# Altium PCB PocketBeagle.PcbDoc (part 1 of 2)
Units mm, origin at the board's own origin, x right, y up, seen from the top; angles counter-clockwise.
Board outline 55 x 35 mm, 4 copper layers (Top, VDD, DigitalGND, Bottom), stack 2.11 mm thick; 63 components, 132 nets, 486 pads, 168 vias.
Unrouted connection lines stored in the file: 3.
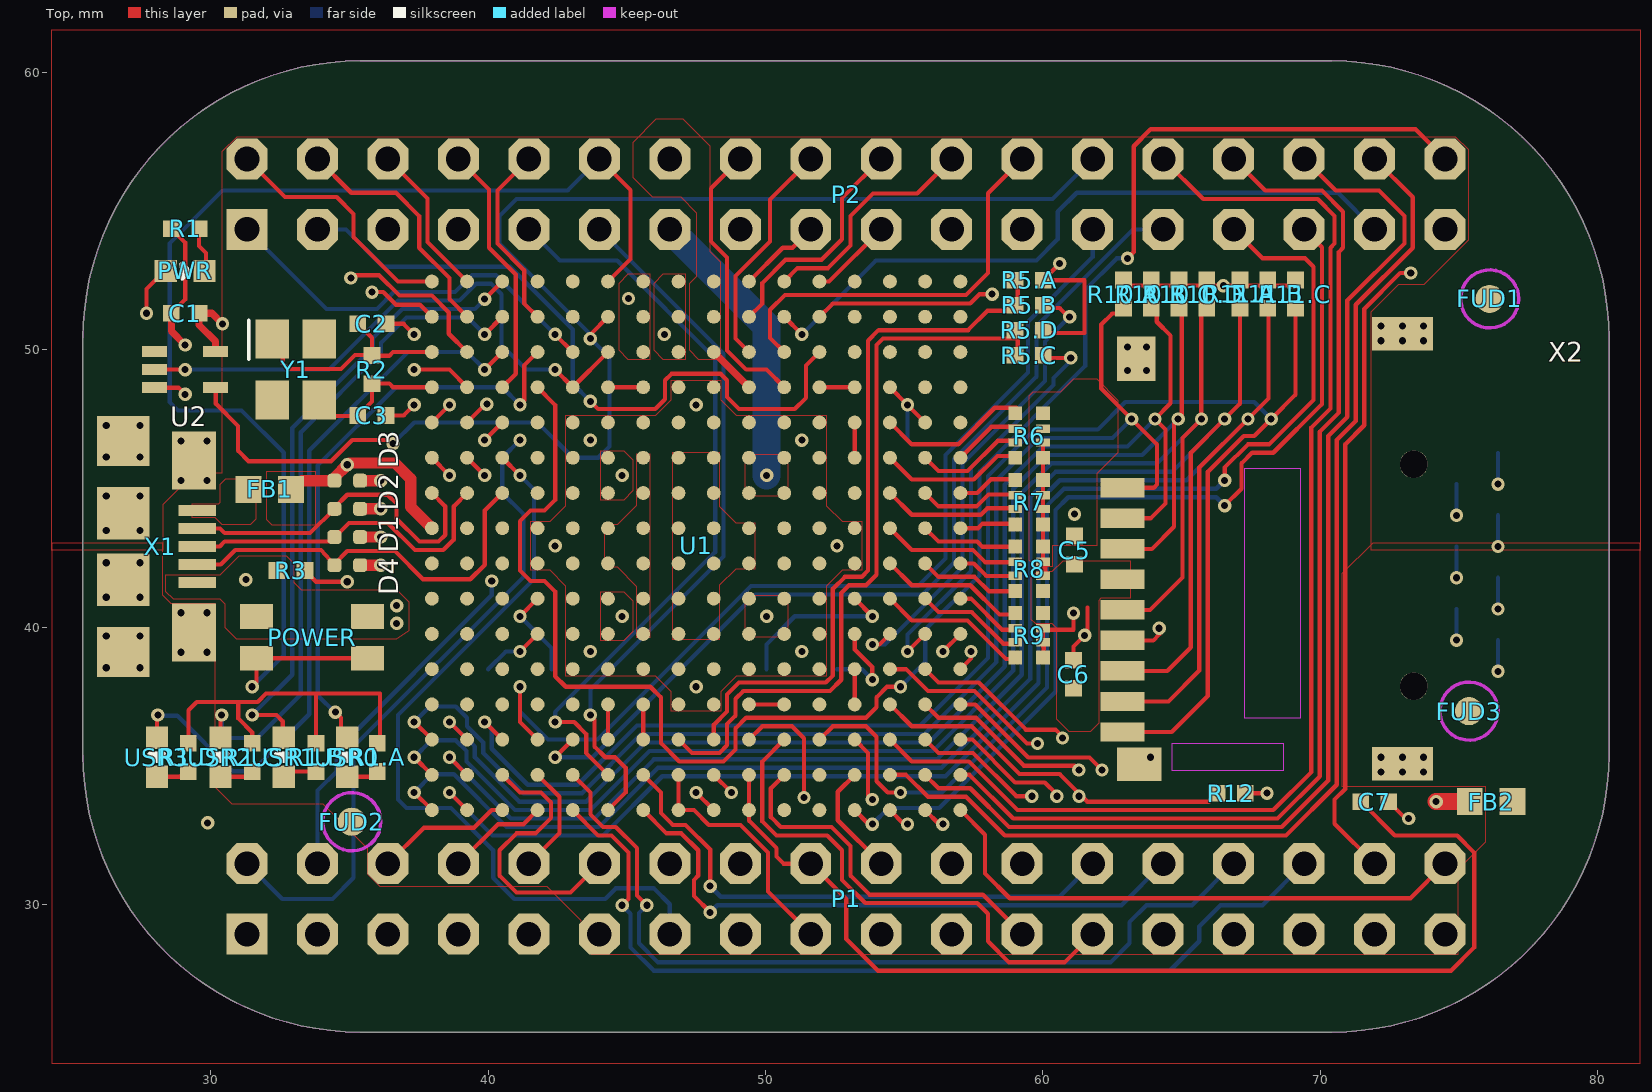
[diagram p0: Top view]
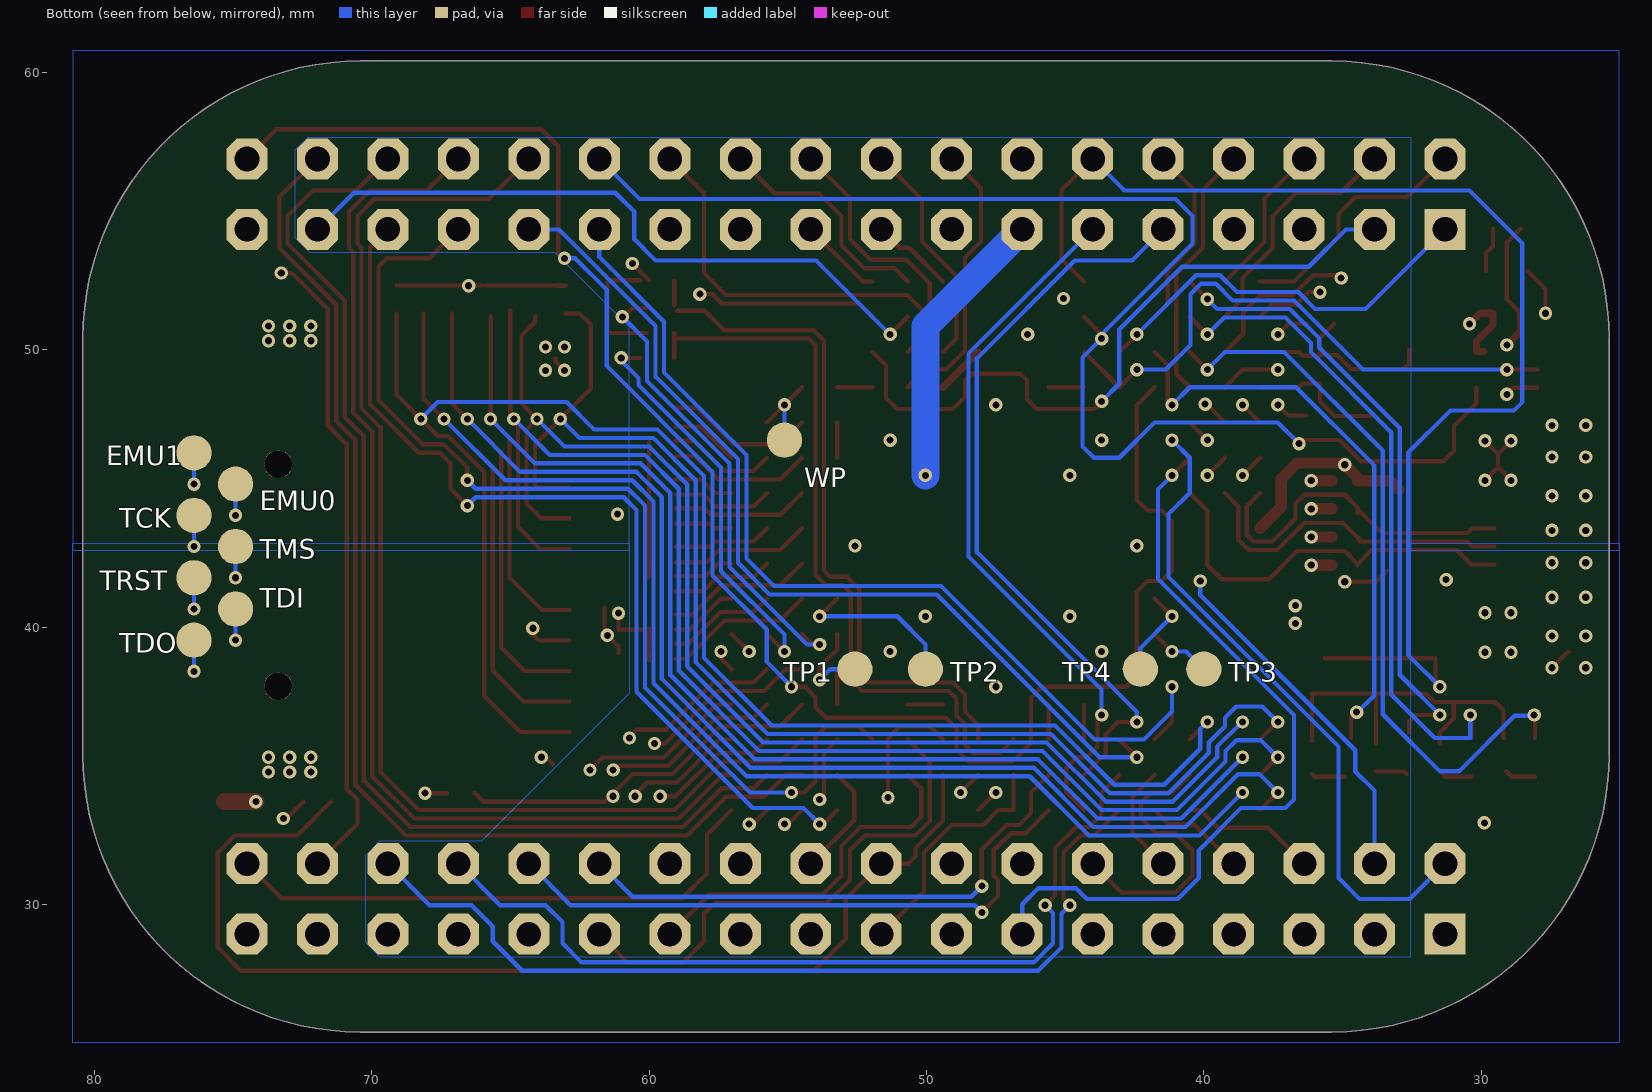
[diagram p1: Bottom view, seen from below]
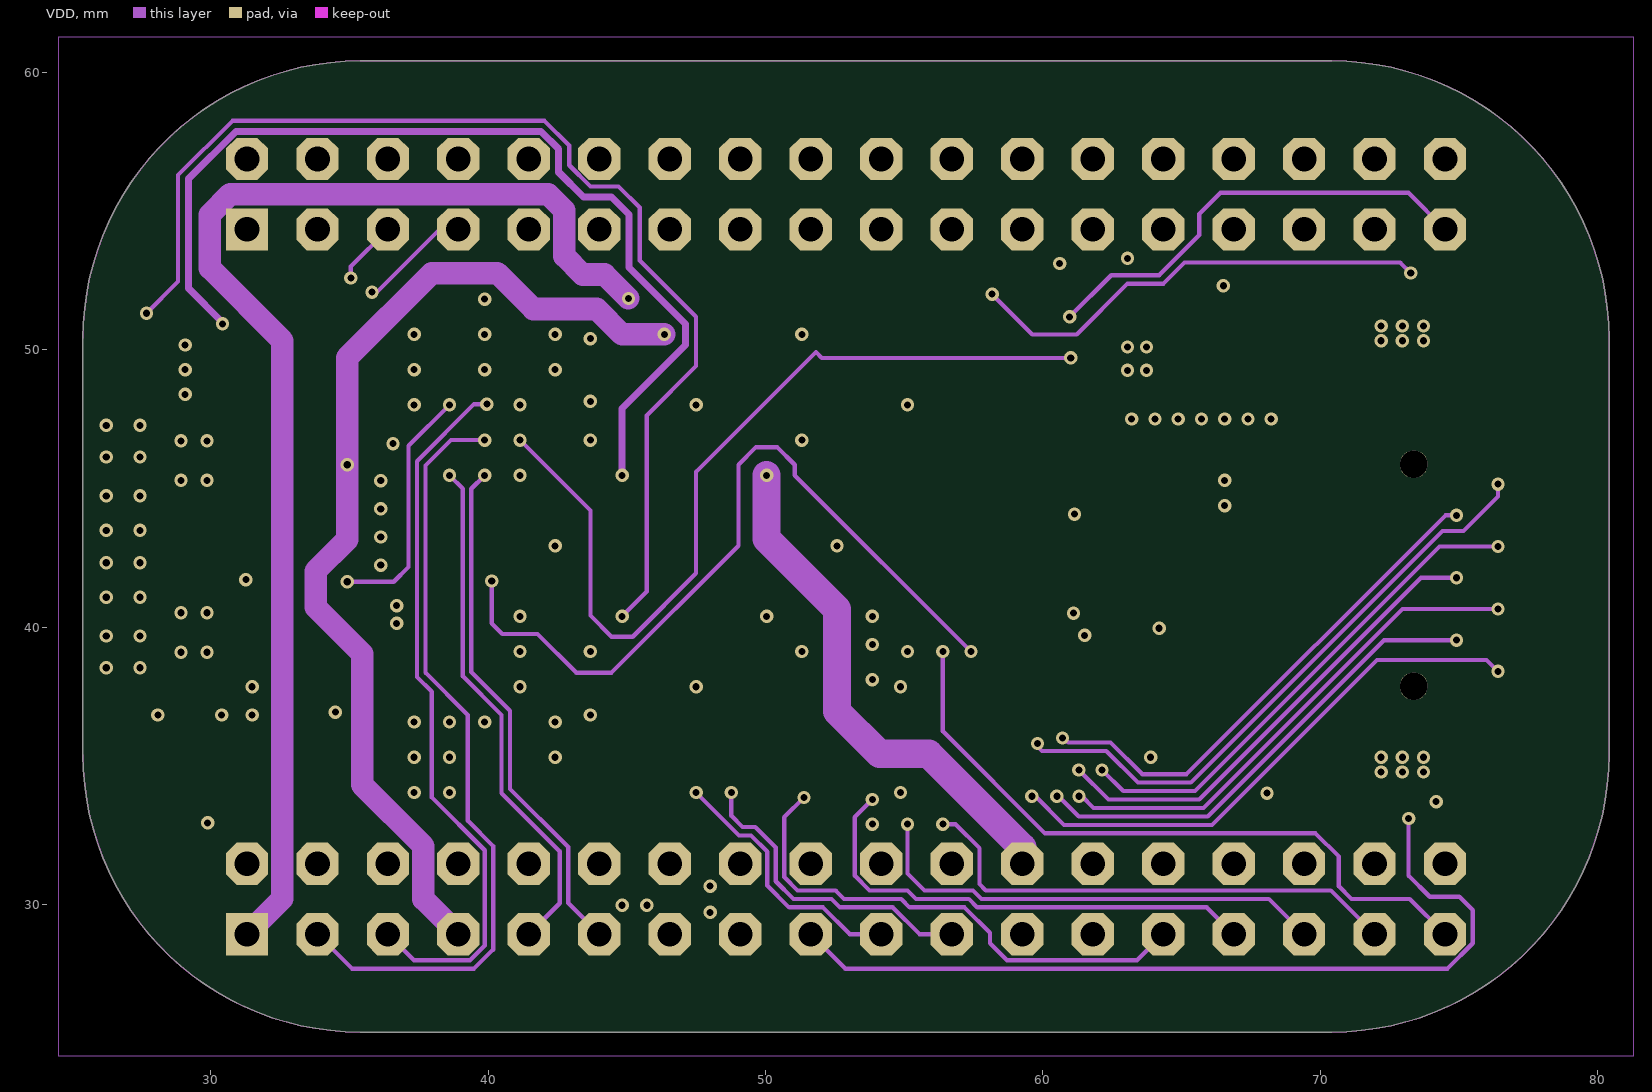
[diagram p2: VDD]
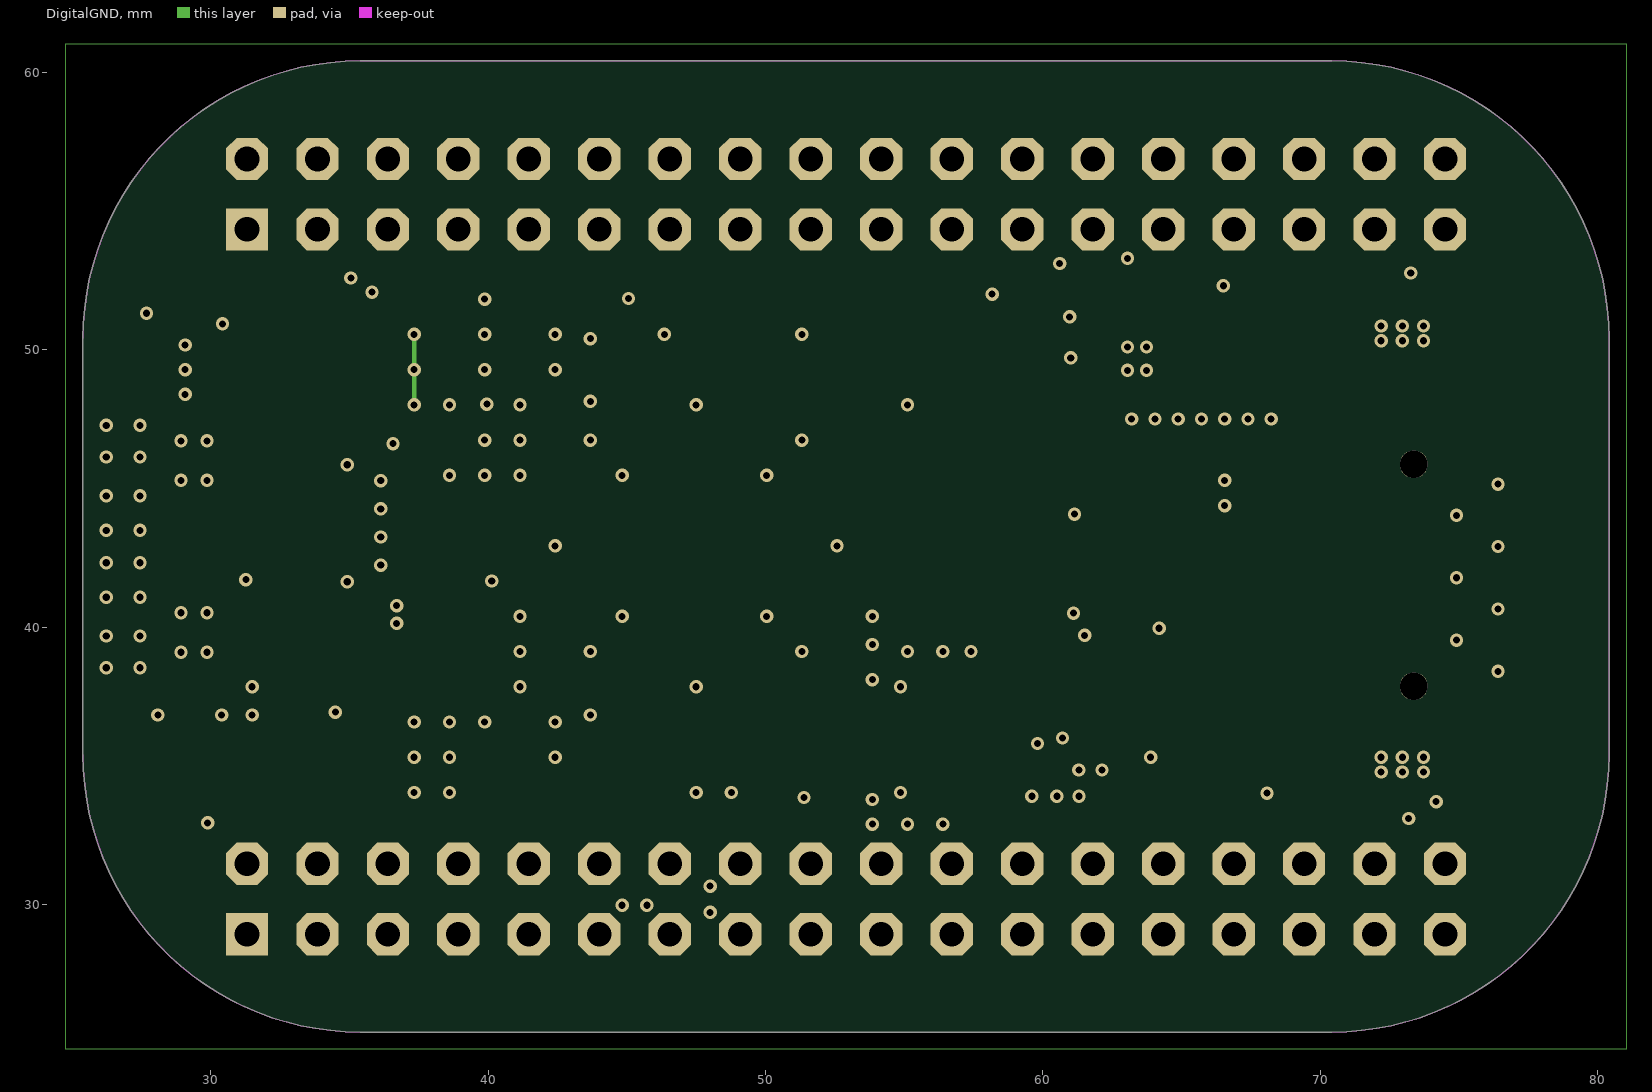
[diagram p3: DigitalGND]
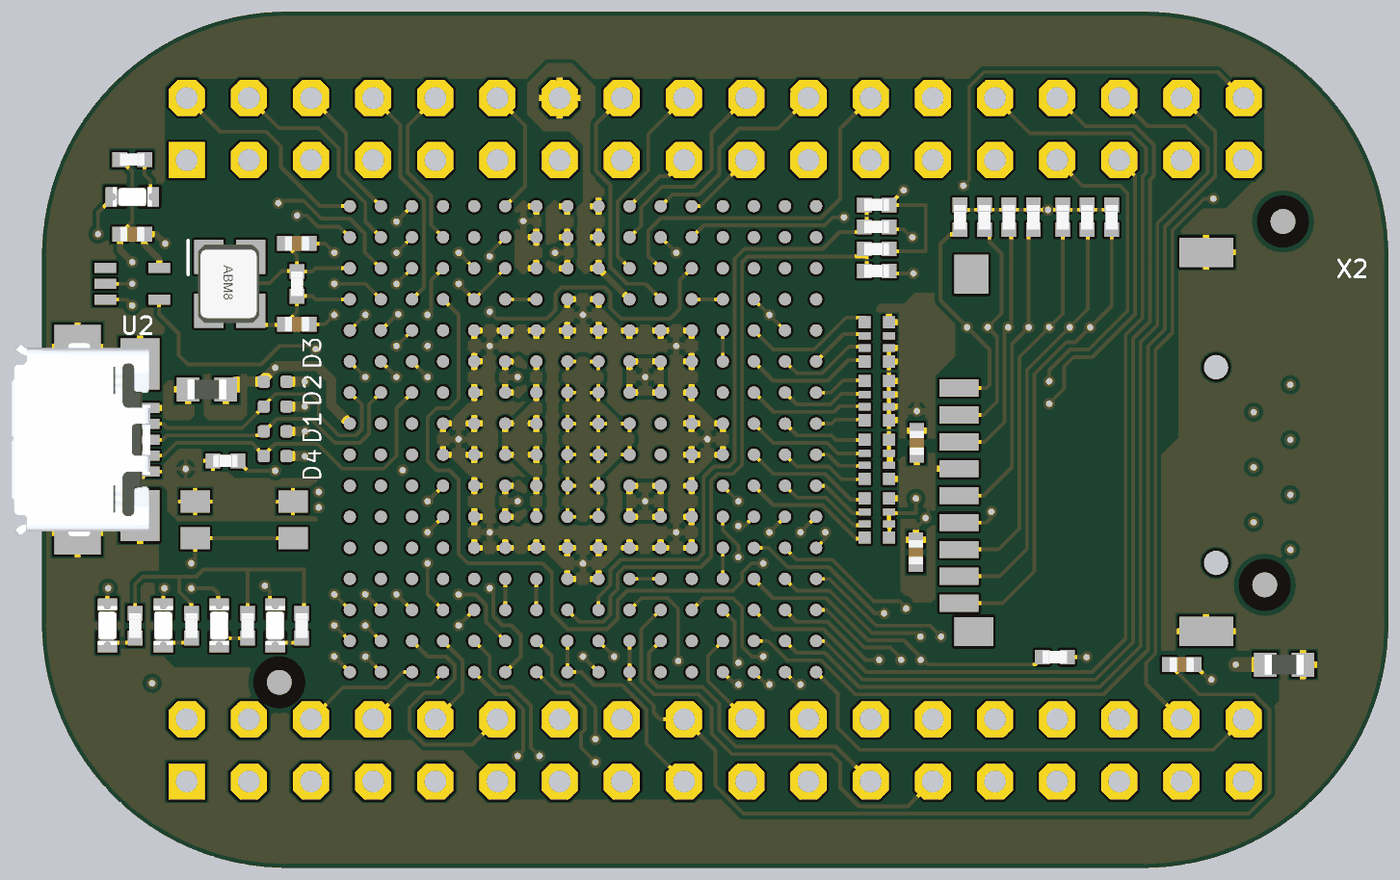
[diagram p5: 3D render of the assembled board from above, using the file's embedded part models]

## Layer stack, top to bottom
Top Solder: solder mask 0.0102, Solder Resist, Dk 3.5
Top: signal copper 0.035
Dielectric 1: prepreg 1.5, FR-4, Dk 4.8
VDD: signal copper 0.035
Dielectric2: prepreg 0.15, FR-4, Dk 4.8
DigitalGND: signal copper 0.035
Dielectric3: dielectric 0.32, FR-4, Dk 4.8
Bottom: signal copper 0.035
Bottom Solder: solder mask 0.0102, Solder Resist, Dk 3.5

## Board outline
70.4,60.4 35.4,60.4 ccw(c35.4,50.4) 25.4,50.4 25.4,35.4 ccw(c35.4,35.4) 35.4,25.4 70.4,25.4 ccw(c70.4,35.4) 80.4,35.4 80.4,50.4 ccw(c70.4,50.4)

## Design rules (kind name [scope] priority, off if disabled: settings)
Clearance "Clearance (Same Net)" [All] p1: gap=0.152 ignorepadtopadclearanceinfootprint=FALSE
Clearance [All] p2: gap=0.152 ignorepadtopadclearanceinfootprint=FALSE
HoleSize HoleSize_For_NetClass_12v [InNetClass('12v')] p1: absolutevalues=TRUE maxlimit=0 minlimit=0 maxpercent=80.000 minpercent=20.000
HoleSize HoleSize_For_NetClass_power [InNetClass('power')] p2: absolutevalues=TRUE maxlimit=0 minlimit=0 maxpercent=80.000 minpercent=20.000
HoleSize [All] p3: absolutevalues=TRUE maxlimit=2540 minlimit=0.254 maxpercent=80.000 minpercent=20.000
HoleToHoleClearance mdDrill [All] p1: gap=0.203 allowstackedmicrovias=TRUE
PasteMaskExpansion Expansion_SMDPaste_OFF [InPadClass('SMDPaste_OFF')] p1: expansion=0
PasteMaskExpansion mlMinCreamFrame [All] p2: expansion=0
PolygonConnect PolygonConnect_For_PolygonThermal_ON_Width100000_Gap60000 [InPolygonClass('PolygonThermal_ON_Width100000_Gap60000')] p1: connectstyle=Relief reliefconductorwidth=0.254 reliefentries=4 polygonreliefangle="90 Angle" airgapwidth=0.152
PolygonConnect PolygonConnect_For_PolygonThermal_ON_Width60000_Gap60000 [InPolygonClass('PolygonThermal_ON_Width60000_Gap60000')] p2: connectstyle=Relief reliefconductorwidth=0.152 reliefentries=4 polygonreliefangle="90 Angle" airgapwidth=0.152
PolygonConnect ThermalVias [IsVia] p3: connectstyle=Direct reliefconductorwidth=0.254 reliefentries=4 polygonreliefangle="90 Angle" airgapwidth=0.254
PolygonConnect [All] p4: connectstyle=Relief reliefconductorwidth=0.254 reliefentries=4 polygonreliefangle="90 Angle" airgapwidth=0.254
RoutingVias [All] p1: holewidth=0.254 width=0.508 viastyle="Through Hole" minholewidth=0.254 minwidth=0.508 maxholewidth=2.54 maxwidth=2.54
SolderMaskExpansion mlMinStopFrame [All] p1: expansion=0.102
Width Width_For_NetClass_12v [InNetClass('12v')] p1: maxlimit=0.254 minlimit=2539.975 preferedwidth=0 toplayer_minwidth=0 midlayer1_minwidth=0 midlayer14_minwidth=0 bottomlayer_minwidth=0 minimp=50.000000 maximp=50.000000 favimp=50.000000
Width Width_For_NetClass_power [InNetClass('power')] p2: maxlimit=0.254 minlimit=2539.975 preferedwidth=0 toplayer_minwidth=0 midlayer1_minwidth=0 midlayer14_minwidth=0 bottomlayer_minwidth=0 minimp=50.000000 maximp=50.000000 favimp=50.000000
Width [All] p3: maxlimit=254 minlimit=0.152 preferedwidth=0.152
27 further rules are at their usual default settings.

## Classes and differential pairs
polygon class PolygonThermal_ON_Width100000_Gap60000: Polygon_1_Net_3.3V Polygon_1_Net_BAT.VIN Polygon_1_Net_CGND Polygon_1_Net_GND Polygon_1_Net_VBUS.RAW Polygon_1_Net_VDD_1V8 Polygon_1_Net_VDD_3V3AUX Polygon_1_Net_VDD_RTC Polygon_1_Net_VIN Polygon_1_Net_VIN.USB Polygon_1_Net_VOUT Polygon_2_Net_3.3V Polygon_2_Net_CGND Polygon_2_Net_GND Polygon_2_Net_VIN.USB Polygon_3_Net_3.3V Polygon_3_Net_CGND Polygon_3_Net_GND Polygon_4_Net_CGND
polygon class PolygonThermal_ON_Width60000_Gap60000: Polygon_1_Net_VDD_3V3A Polygon_4_Net_GND
pad class SMDPaste_OFF: EMU0-TP EMU1-TP TCK-TP TDI-TP TDO-TP TMS-TP TP1-TP TP2-TP TP3-TP TP4-TP TRST-TP WP-TP

## Components (designator, comment, footprint, x,y, rotation, side; value= is the part's Value field where it differs from the comment)
C1 "CL05B104KO5NNNC" C_0402 29.083,51.308 r180 top value=100nF
C2 "0402CG220J500NT" C_0402 35.814,50.927 r180 top value=22pF
C3 "0402CG220J500NT" C_0402 35.814,47.625 r180 top value=22pF
C5 "CL05B104KO5NNNC" C_0402 61.138,42.774 r90 top value=100nF
C6 "CL05A106MQ5NUNC" C_0402 61.1,38.3 r270 top value=10uF
C7 "CL05B104KO5NNNC" C_0402 71.958,33.706 r0 top value=100nF
D1 "D-ESD-2P-DOUBLE" ESD-0402-NO-SILK 34.925,43.243 r180 top
D2 "D-ESD-2P-DOUBLE" ESD-0402-NO-SILK 34.925,44.259 r180 top
D3 "D-ESD-2P-DOUBLE" ESD-0402-NO-SILK 34.925,45.276 r180 top
D4 "D-ESD-2P-DOUBLE" ESD-0402-NO-SILK 34.925,42.227 r180 top
EMU0 "PTR1B1,27" B1,27 74.9,45.15 r90 bottom
EMU1 "PTR1B1,27" B1,27 76.4,46.275 r90 bottom
FB1 "GZ1608D601TF" L_0603 32.131,44.958 r0 top value=10uH
FB2 "GZ1608D601TF" L_0603 76.149,33.706 r180 top value=10uH
FUD1 "FIDUCIAL" FIDUCIAL_40MIL 76.099,51.825 r0 top
FUD2 "FIDUCIAL" FIDUCIAL_40MIL 35.09,32.982 r270 top
FUD3 "FIDUCIAL" FIDUCIAL_40MIL 75.354,36.968 r0 top
P1 "2X18-(INCH)-0.1-TH-(35MIL-DIA)-W/O-SILK" TH-2X18-(35MIL-DIA)-W/O-SILK 52.9,30.2 r0 top
P2 "2X18-(INCH)-0.1-TH-(35MIL-DIA)-W/O-SILK" TH-2X18-(35MIL-DIA)-W/O-SILK 52.9,55.6 r0 top
POWER "MINI_PUSHBUTTON" MINI_PUSHBUTTON 33.655,39.624 r0 top
PWR "KT-0603R" D_0603 29.083,52.832 r180 top
R1 "0402WGF1001TCE" R_0402 29.083,54.356 r0 top value=1k
R1.A "0402WGF1001TCE" R_0402 36,35.3 r90 top value=1k
R1.B "0402WGF1001TCE" R_0402 33.8,35.3 r90 top value=1k
R1.C "0402WGF1001TCE" R_0402 31.5,35.3 r90 top value=1k
R1.D "0402WGF1001TCE" R_0402 29.2,35.3 r90 top value=1k
R2 "0402WGF1004TCE" R_0402 35.814,49.276 r90 top value=1M
R3 "0402WGF1002TCE" R_0402 32.893,42.037 r0 top value=10k
R5.A "0402WGF1002TCE" R_0402 59.5,52.5 r0 top value=10k
R5.B "0402WGF1002TCE" R_0402 59.5,51.6 r0 top value=10k
R5.C "0402WGF1002TCE" R_0402 59.5,49.8 r0 top value=10k
R5.D "0402WGF1002TCE" R_0402 59.5,50.7 r0 top value=10k
R6 "100k" RN0804 59.5,46.9 r270 top
R7 "100k" RN0804 59.5,44.5 r270 top
R8 "100k" RN0804 59.5,42.1 r270 top
R9 "100k" RN0804 59.5,39.7 r90 top
R10.A "0402WGF1002TCE" R_0402 62.9,52 r90 top value=10k
R10.B "0402WGF1002TCE" R_0402 63.9,52 r90 top value=10k
R10.C "0402WGF1002TCE" R_0402 64.9,52 r90 top value=10k
R10.D "0402WGF1002TCE" R_0402 65.9,52 r90 top value=10k
R11.A "0402WGF1002TCE" R_0402 67.1,52 r90 top value=10k
R11.B "0402WGF1002TCE" R_0402 68.1,52 r90 top value=10k
R11.C "0402WGF1002TCE" R_0402 69.1,52 r90 top value=10k
R12 "0402WGF1002TCE" R_0402 66.777,34.011 r180 top value=10k
TCK "PTR1B1,27" B1,27 76.4,44.025 r90 bottom
TDI "PTR1B1,27" B1,27 74.9,40.65 r90 bottom
TDO "PTR1B1,27" B1,27 76.4,39.525 r90 bottom
TMS "PTR1B1,27" B1,27 74.9,42.9 r90 bottom
TP1 "PTR1B1,27" B1,27 52.578,38.481 r180 bottom
TP2 "PTR1B1,27" B1,27 50.038,38.481 r180 bottom
TP3 "PTR1B1,27" B1,27 40.005,38.481 r180 bottom
TP4 "PTR1B1,27" B1,27 42.291,38.481 r180 bottom
TRST "PTR1B1,27" B1,27 76.4,41.775 r90 bottom
U1 "OSD3358-512M-BSM" OSD335X-BGA-256 47.498,42.926 r90 top
U2 "SN74LVC1G07DCK" SC70(TI-DCK) 29.083,49.276 r90 top
USR0 "KT-0603R" D_0603 34.925,35.306 r90 top
USR1 "KT-0603R" D_0603 32.639,35.306 r90 top
USR2 "KT-0603R" D_0603 30.353,35.306 r90 top
USR3 "KT-0603R" D_0603 28.067,35.306 r90 top
WP "PTR1B1,27" B1,27 55.118,46.736 r180 bottom
X1 "10118192-0001LF" 10118192-0001LF(MICRO-USB-B-AMPHENOL-FCI) 26.85,42.9 r270 top
X2 "MICROSD" MICROSD 62.863,40.616 r0 top
Y1 "X322524MOB4SI" X322512MSB4SI 33.02,49.276 r270 top value=24MHz

## Footprints (in the part's own frame and the unit in brackets; to place one, negate y for a bottom-side part, rotate by r counter-clockwise, add the part's x,y. Pads: shape width x height; smd on the part's side, far side on the other; paste and mask are expansions set on the pad)
10118192-0001LF(MICRO-USB-B-AMPHENOL-FCI) [mm] "10118192-0001LF(MICRO-USB-B-AMPHENOL-FCI)"
  rect 1.8x1.9 smd: CGND1(-3.8,0) CGND4(3.8,0)
  rect 1.9x1.9 smd: CGND2(-1.2,0) CGND3(1.2,0)
  rect 2.1x1.6 smd: CGND5(3.1,2.55) CGND6(-3.1,2.55)
  rect 0.4x1.35 smd: D+(0,2.675) D-(-0.65,2.675) GND(1.3,2.675) ID(0.65,2.675) VBUS(-1.3,2.675)
  body extent -3.96,-2.7 3.96,2.97, height 2.5
B1,27 [mm] "B1,27"
  rrect100% 1.27x1.27 smd paste+0: TP(0,0)
  body extent -0.65,-0.65 0.65,0.65, height 1.27
C_0402 [mm] "Chip Capacitor; Body 1.0 x 0.5 mm (LxW typ)"
  rect 0.6x0.6 smd: 1(-0.508,0) 2(0.508,0)
  body extent -0.5,-0.3 0.5,0.3, height 0.2
D_0603 [mm] "Chip Diode; Body 1.6 x 0.8 mm (LxW typ)"
  rect 0.8x0.8 smd: 1(-0.7,0) 2(0.7,0)
  silkscreen extent -0.1,-0.25 0.1,0.25, body extent -0.8,-0.4 0.8,0.4, height 0.35
ESD-0402-NO-SILK [mm] "ESD-0402-NO-SILK"
  rrect50% 0.5x0.5 smd: 1(-0.463,0) 2(0.463,0)
  body extent -0.89,-0.38 0.89,0.38, height 3.81
FIDUCIAL_40MIL [mil] "FIDUCIAL_40MIL"
  rrect100% 40x40 smd: P$1(0,0)
  Top keep-out circle w5: c0,0 r41.23
  body extent -42,-42 42,42, height 150
L_0603 [mm]
  rect 0.93x0.98 smd: 1(-0.77,0) 2(0.77,0)
  body extent -0.82,-0.41 0.83,0.41, height 0.46
MICROSD [mm] "MICROSD"
  rect 1.6x0.7 smd: 1(0,4.4) 2(0,3.3) 3(0,2.2) 4(0,1.1) 5(0,0) 6(0,-1.1) 7(0,-2.2) 8(0,-3.3) 9(0,-4.4)
  round 1 hole 1 unplated: 1(10.5,-2.75) 1(10.5,5.25)
  rect 1.6x1.2 smd: G1(0.6,-5.56)
  rect 2.2x1.2 smd: G2(10.1,-5.55) G3(10.1,9.95)
  rect 1.4x1.6 smd: G4(0.5,9.05)
  Top keep-out region: 1.8,-5.8 1.8,-4.8 5.8,-4.8 5.8,-5.8
  Top keep-out region: 4.4,-3.9 4.4,5.1 6.4,5.1 6.4,-3.9
  body extent -0.8,-6.16 11.2,10.55, height 1.27
MINI_PUSHBUTTON [mm] "MINI_PUSHBUTTON"
  rect 1.2x0.9 smd: 1(-2,0.75) 2(2,0.75) 3(-2,-0.75) 4(2,-0.75)
  body extent -2.6,-1.57 2.6,1.57, height 3.81
OSD335X-BGA-256 [mm] "OSD335X-BGA-256"
  rrect100% 0.5x0.5 smd: A1(-9.525,-9.525) A2(-9.525,-8.255) A3(-9.525,-6.985) A4(-9.525,-5.715) A5(-9.525,-4.445) A6(-9.525,-3.175) A7(-9.525,-1.905) A8(-9.525,-0.635) A9(-9.525,0.635) A10(-9.525,1.905) A11(-9.525,3.175) A12(-9.525,4.445) A13(-9.525,5.715) A14(-9.525,6.985) A15(-9.525,8.255) A16(-9.525,9.525) B1(-8.255,-9.525) B2(-8.255,-8.255) B3(-8.255,-6.985) B4(-8.255,-5.715) B5(-8.255,-4.445) B6(-8.255,-3.175) B7(-8.255,-1.905) B8(-8.255,-0.635) B9(-8.255,0.635) B10(-8.255,1.905) B11(-8.255,3.175) B12(-8.255,4.445) B13(-8.255,5.715) B14(-8.255,6.985) B15(-8.255,8.255) B16(-8.255,9.525) C1(-6.985,-9.525) C2(-6.985,-8.255) C3(-6.985,-6.985) C4(-6.985,-5.715) C5(-6.985,-4.445) C6(-6.985,-3.175) C7(-6.985,-1.905) C8(-6.985,-0.635) C9(-6.985,0.635) C10(-6.985,1.905) C11(-6.985,3.175) C12(-6.985,4.445) C13(-6.985,5.715) C14(-6.985,6.985) C15(-6.985,8.255) C16(-6.985,9.525) D1(-5.715,-9.525) D2(-5.715,-8.255) D3(-5.715,-6.985) D4(-5.715,-5.715) D5(-5.715,-4.445) D6(-5.715,-3.175) D7(-5.715,-1.905) D8(-5.715,-0.635) D9(-5.715,0.635) D10(-5.715,1.905) D11(-5.715,3.175) D12(-5.715,4.445) D13(-5.715,5.715) D14(-5.715,6.985) D15(-5.715,8.255) D16(-5.715,9.525) E1(-4.445,-9.525) E2(-4.445,-8.255) E3(-4.445,-6.985) E4(-4.445,-5.715) E5(-4.445,-4.445) E6(-4.445,-3.175) E7(-4.445,-1.905) E8(-4.445,-0.635) E9(-4.445,0.635) E10(-4.445,1.905) E11(-4.445,3.175) E12(-4.445,4.445) E13(-4.445,5.715) E14(-4.445,6.985) E15(-4.445,8.255) E16(-4.445,9.525) F1(-3.175,-9.525) F2(-3.175,-8.255) F3(-3.175,-6.985) F4(-3.175,-5.715) F5(-3.175,-4.445) F6(-3.175,-3.175) F7(-3.175,-1.905) F8(-3.175,-0.635) F9(-3.175,0.635) F10(-3.175,1.905) F11(-3.175,3.175) F12(-3.175,4.445) F13(-3.175,5.715) F14(-3.175,6.985) F15(-3.175,8.255) F16(-3.175,9.525) G1(-1.905,-9.525) G2(-1.905,-8.255) G3(-1.905,-6.985) G4(-1.905,-5.715) G5(-1.905,-4.445) G6(-1.905,-3.175) G7(-1.905,-1.905) G8(-1.905,-0.635) G9(-1.905,0.635) G10(-1.905,1.905) G11(-1.905,3.175) G12(-1.905,4.445) G13(-1.905,5.715) G14(-1.905,6.985) G15(-1.905,8.255) G16(-1.905,9.525) H1(-0.635,-9.525) H2(-0.635,-8.255) H3(-0.635,-6.985) H4(-0.635,-5.715) H5(-0.635,-4.445) H6(-0.635,-3.175) H7(-0.635,-1.905) H8(-0.635,-0.635) H9(-0.635,0.635) H10(-0.635,1.905) H11(-0.635,3.175) H12(-0.635,4.445) H13(-0.635,5.715) H14(-0.635,6.985) H15(-0.635,8.255) H16(-0.635,9.525) J1(0.635,-9.525) J2(0.635,-8.255) J3(0.635,-6.985) J4(0.635,-5.715) J5(0.635,-4.445) J6(0.635,-3.175) J7(0.635,-1.905) J8(0.635,-0.635) J9(0.635,0.635) J10(0.635,1.905) J11(0.635,3.175) J12(0.635,4.445) J13(0.635,5.715) J14(0.635,6.985) J15(0.635,8.255) J16(0.635,9.525) K1(1.905,-9.525) K2(1.905,-8.255) K3(1.905,-6.985) K4(1.905,-5.715) K5(1.905,-4.445) K6(1.905,-3.175) K7(1.905,-1.905) K8(1.905,-0.635) K9(1.905,0.635) K10(1.905,1.905) K11(1.905,3.175) K12(1.905,4.445) K13(1.905,5.715) K14(1.905,6.985) K15(1.905,8.255) K16(1.905,9.525) L1(3.175,-9.525) L2(3.175,-8.255) L3(3.175,-6.985) L4(3.175,-5.715) L5(3.175,-4.445) L6(3.175,-3.175) L7(3.175,-1.905) L8(3.175,-0.635) L9(3.175,0.635) L10(3.175,1.905) L11(3.175,3.175) L12(3.175,4.445) L13(3.175,5.715) L14(3.175,6.985) L15(3.175,8.255) L16(3.175,9.525) M1(4.445,-9.525) M2(4.445,-8.255) M3(4.445,-6.985) M4(4.445,-5.715) M5(4.445,-4.445) M6(4.445,-3.175) M7(4.445,-1.905) M8(4.445,-0.635) M9(4.445,0.635) M10(4.445,1.905) M11(4.445,3.175) M12(4.445,4.445) M13(4.445,5.715) M14(4.445,6.985) M15(4.445,8.255) M16(4.445,9.525) N1(5.715,-9.525) N2(5.715,-8.255) N3(5.715,-6.985) N4(5.715,-5.715) N5(5.715,-4.445) N6(5.715,-3.175) N7(5.715,-1.905) N8(5.715,-0.635) N9(5.715,0.635) N10(5.715,1.905) N11(5.715,3.175) N12(5.715,4.445) N13(5.715,5.715) N14(5.715,6.985) N15(5.715,8.255) N16(5.715,9.525) P1(6.985,-9.525) P2(6.985,-8.255) P3(6.985,-6.985) P4(6.985,-5.715) P5(6.985,-4.445) P6(6.985,-3.175) P7(6.985,-1.905) P8(6.985,-0.635) P9(6.985,0.635) P10(6.985,1.905) P11(6.985,3.175) P12(6.985,4.445) P13(6.985,5.715) P14(6.985,6.985) P15(6.985,8.255) P16(6.985,9.525) R1(8.255,-9.525) R2(8.255,-8.255) R3(8.255,-6.985) R4(8.255,-5.715) R5(8.255,-4.445) R6(8.255,-3.175) R7(8.255,-1.905) R8(8.255,-0.635) R9(8.255,0.635) R10(8.255,1.905) R11(8.255,3.175) R12(8.255,4.445) R13(8.255,5.715) R14(8.255,6.985) R15(8.255,8.255) R16(8.255,9.525) T1(9.525,-9.525) T2(9.525,-8.255) T3(9.525,-6.985) T4(9.525,-5.715) T5(9.525,-4.445) T6(9.525,-3.175) T7(9.525,-1.905) T8(9.525,-0.635) T9(9.525,0.635) T10(9.525,1.905) T11(9.525,3.175) T12(9.525,4.445) T13(9.525,5.715) T14(9.525,6.985) T15(9.525,8.255) T16(9.525,9.525)
  body extent -10.4,-10.4 10.5,10.5, height 1
R_0402 [mm] "Body 1.0 x 0.5 mm (LxW typ)"
  rect 0.6x0.6 smd: 1(-0.508,0) 2(0.508,0)
  body extent -0.5,-0.25 0.5,0.25, height 0.35
RN0804 [mm] "RN0804"
  rect 0.498x0.5 smd: 1(-0.801,-0.5) 4(0.801,-0.5) 5(0.801,0.5) 8(-0.801,0.5)
  rect 0.3x0.5 smd: 2(-0.25,-0.5) 3(0.25,-0.5) 6(0.25,0.5) 7(-0.25,0.5)
  body extent -1.05,-0.75 1.05,0.75, height 1.27
SC70(TI-DCK) [mm] "SC70(TI-DCK)"
  rect 0.4x0.9 smd: 1(0.65,1.1) 2(0,1.1) 3(-0.65,1.1) 4(-0.65,-1.1) 5(0.65,-1.1)
  body extent -1.07,-1.55 1.07,1.55, height 3.81
TH-2X18-(35MIL-DIA)-W/O-SILK [mil] "TH-2X18-(35MIL-DIA)-W/O-SILK"
  rect 58.09x58.09 / inner rect 60x60 / far side rect 58.09x58.09 hole 35: 1(-850,-50)
  oct 58.09x58.09 / inner oct 60x60 / far side oct 58.09x58.09 hole 35: 2(-850,50) 3(-750,-50) 4(-750,50) 5(-650,-50) 6(-650,50) 7(-550,-50) 8(-550,50) 9(-450,-50) 10(-450,50) 11(-350,-50) 12(-350,50) 13(-250,-50) 14(-250,50) 15(-150,-50) 16(-150,50) 17(-50,-50) 18(-50,50) 19(50,-50) 20(50,50) 21(150,-50) 22(150,50) 23(250,-50) 24(250,50) 25(350,-50) 26(350,50) 27(450,-50) 28(450,50) 29(550,-50) 30(550,50) 31(650,-50) 32(650,50) 33(750,-50) 34(750,50) 35(850,-50) 36(850,50)
  body extent -880,-80 880,80, height 150
X322512MSB4SI [mm] "Crystal Package 4-SMD 3.2x2.5mm"
  rect 1.4x1.2 smd: 1(-1.1,-0.8) 2(1.1,-0.8) 3(1.1,0.9) 4(-1.1,0.9)
  silkscreen extent -1.78,-1.65 -0.38,-1.65, body extent -1.6,-1.24 1.6,1.24, height 0.8

## Part data
C1 C5 C7: "C - CAPACITOR - MLCC - 100nF - 16V - 0402", JLC Availability=Basic, LCSC Part #=C1525, WVDC=16
C2 C3: "C - CAPACITOR - MLCC - 22pF - 50V - 0402", JLC Availability=Basic, LCSC Part #=C1555, WVDC=50
C6: "C - CAPACITOR - MLCC - 10uF - 6.3V - 0402", JLC Availability=Basic, LCSC Part #=C15525, WVDC=6.3
EMU0 EMU1 TCK TDI TDO TMS TP1 TP2 TP3 TP4 TRST WP: "TEST PIN", DeviceName=B1,27, DeviceSetName=PTR1, GateName_1=G$1, LibraryName=testpad, SymbolName_1=PS, TP_SIGNAL_NAME=>TP_SIGNAL_NAME
FB1 FB2: "L - FERRITE - 200mA 600R @ 100MHz - 0603", JLC Availability=Basic, LCSC Part #=C1002
PWR USR0 USR1 USR2 USR3: "D - LED - 0603 - Red", JLC Availability=Basic, LCSC Part #=C2286
R1 R1.A R1.B R1.C R1.D: "R - RESISTOR - SMD - 1k - 1% - 0402", JLC Availability=Basic, LCSC Part #=C11702
R2: "R - RESISTOR - SMD - 1M - 1% - 0402", JLC Availability=Basic, LCSC Part #=C26083
R3 R5.A R5.B R5.C R5.D R10.A R10.B R10.C R10.D R11.A R11.B R11.C R12: "R - RESISTOR - SMD - 10k - 1% - 0402", JLC Availability=Basic, LCSC Part #=C25744
R6 R7 R8 R9: library part RESISTOR.NETWORK-(4), DeviceSetName=RESISTOR.NETWORK-(4), GateName_1=G$1, LibraryName=GHI-BasicComponents, SymbolName_1=RESISTOR.NETWORK-(4)
U1: "U - IC - Octavo Systems LLC OSD335x Family SiP:  21mm x 21mm, 1.27mm pitch 256 pin BGA contains AM3358, 512MB DDR3, TPS65217, TL5209, EEPROM and passives.  Commerical Temperature:  0C to 85C.", LCSC Part #=C6944652, Connecttogetherwithpour="Connect together with pour", DeviceSetName=OSD3358-512M-BSM, GateName_1=A, GateName_2=B, GateName_3=C, GateName_4=D, GateName_5=E, GateName_6=F, GNDtoprogramEEPROM="GND to program EEPROM", I2C0=I2C0, LibraryName=GHI-SoMs-Processors, Reset=Reset, SIPA="SIP A", SymbolName_1=OSD335X-SM-LOGICAL-A, SymbolName_2=OSD335X-SM-LOGICAL-B, SymbolName_3=OSD335X-SM-LOGICAL-C, SymbolName_4=OSD335X-SM-LOGICAL-D, SymbolName_5=OSD335X-SM-LOGICAL-E, SymbolName_6=OSD335X-SM-LOGICAL-F
X1: "J - JACK - Amphenol FCI Micro USB Type B Complete Surface Mount (SMT) no guide holes", LCSC Part #=C132564, DeviceSetName=10118192-0001LF, GateName_1=G$1, LibraryName=GHI-Connectors, SymbolName_1=MICRO-USB-TYPE-B-CONNECTOR
Y1: "Y - RESONATOR - 24MHZ ±10PPM", JLC Availability=Extended, LCSC Part #=C70590
D1 D2 D3 D4: DeviceSetName=D-ESD-2P-DOUBLE, GateName_1=G$1, LibraryName=Discrete-new, SymbolName_1=D-ESD-2P-DOUBLE
FUD1 FUD2 FUD3: DeviceSetName=FIDUCIAL, GateName_1=G$1, LibraryName=GHI, SymbolName_1=FIDUCIAL
P1 P2: DeviceName=TH-(35MIL-DIA)-W/O-SILK, DeviceSetName=2X18-(INCH)-0.1-, GateName_1=G$1, LibraryName=GHI-Headers, SymbolName_1=PINHEAD-2X18
POWER: DeviceSetName=MINI_PUSHBUTTON, GateName_1=G$1, LibraryName=GHI2, SymbolName_1=MINI_PUSHBUTTON
U2: A=A, DeviceSetName=SN74LVC1G07DCK, GateName_1=G$1, GND=GND, LibraryName=GHI-IC, SymbolName_1=SN74LVC1G07, Vcc=Vcc, Y=Y
X2: DeviceSetName=MICROSD, GateName_1=G$1, LibraryName=microSD, SymbolName_1=MICROSD

## Via types
v1: diameter 0.48, hole 0.254, Top to Bottom, tented both sides, 168 vias

## Nets (pads, with @x,y where several pads share a name; then routed paths per layer and width w, separated by ;. In a path a pad name is that pad's centre, name@x,y a point inside that pad or via, vN(x,y) a via of type N, cw(c..) or ccw(c..) an arc to the next point about the centre after c; other vN are vias at no path point)
3.3V: C5.1 C6.1 P1.14 P2.23 R6.7 R8.5 R9.4 R10.A.2 R10.B.2 R10.C.2 R10.D.2 R11.A.2 R11.B.2 R11.C.2 U1.F6 U1.F7 U1.G6 U1.G7 X2.4 | length 7.8
  Top w0.152: C6.1@61.1,39.07 61.1,39.3 v1(61.5,39.7) 61.6,39.8 61.6,40.7 ; R10.A.2@63,52.3 63.3,52.3 63.308,52.308 R10.D.2@65.9,52.308 ; R10.D.2@66.008,52.308 67.1,52.308 R11.C.2@69.1,52.308
  other v1: 50.038,40.386 66.5,52.3
(U1.A15)MMC0.D1: R11.B.1 U1.A15 X2.8 | length 57.5
  Top w0.152: v1(38.608,34.036) U1.A15@39.243,33.401 ; X2.8@62.863,37.316 64.519,37.316 65.634,38.43 65.634,45.745 v1(67.386,47.498) 68.127,48.239 R11.B.1@68.127,51.3
  Bottom w0.152: v1(38.608,34.036) 40.157,32.487 44.145,32.487 46.279,34.62 56.49,34.62 59.842,37.973 59.842,44.526 60.604,45.288 65.176,45.288 v1(67.386,47.498)
(U1.A16)MMC0.D0: R11.A.1 U1.A16 X2.7 | length 56.7
  Top w0.152: v1(37.338,34.036) U1.A16@37.973,33.401 ; X2.7@62.863,38.416 64.476,38.416 65.329,39.268 65.329,46.279 v1(66.548,47.498) 67.1,48.05 R11.A.1@67.1,51.292
  Bottom w0.152: v1(37.338,34.036) 37.998,34.696 38.76,34.696 40.665,32.791 43.993,32.791 46.126,34.925 56.337,34.925 59.538,38.125 59.538,44.679 60.452,45.593 64.643,45.593 v1(66.548,47.498)
(U1.B15)MMC0.CLK: R10.D.1 U1.B15 X2.5 | length 51.1
  Top w0.152: v1(38.608,35.306) U1.B15@39.243,34.671 ; X2.5@62.863,40.616 63.857,40.616 65.024,41.783 65.024,46.812 v1(65.71,47.498) 65.7,47.508 R10.D.1@65.7,51.2
  Bottom w0.152: v1(38.608,35.306) 40.818,33.096 43.84,33.096 45.974,35.23 56.185,35.23 59.233,38.278 59.233,44.831 60.3,45.898 64.11,45.898 v1(65.71,47.498)
(U1.B16)MMC0.CMD: R10.C.1 U1.B16 X2.3 | length 49.7
  Top w0.152: v1(37.338,35.306) U1.B16@37.973,34.671 ; X2.3@62.863,42.816 63.923,42.816 64.719,43.612 64.719,47.346 v1(64.872,47.498) 65,47.626 R10.C.1@65,51.4
  Bottom w0.152: v1(37.338,35.306) 37.948,35.916 38.837,35.916 39.218,35.535 39.218,35.154 40.97,33.401 43.688,33.401 45.822,35.535 56.032,35.535 58.928,38.43 58.928,44.983 60.147,46.203 63.576,46.203 v1(64.872,47.498)
(U1.C8)AIN5~1.8V: R5.A.1 R5.B.1 U1.C8 | length 25.5
  Top w0.152: U1.C8@48.133,35.941 48.133,36.474 48.616,36.957 48.616,37.567 49.047,37.998 52.172,37.998 52.426,38.252 52.426,41.377 52.857,41.808 53.467,41.808 53.696,42.037 53.696,50.317 54.077,50.698 57.302,50.698 58.004,51.4 R5.B.1@58.985,51.4 ; R5.B.1@59.092,51.6 R5.A.1@59.092,52.492
(U1.C9)AIN6~1.8V: R5.C.1 R5.D.1 U1.C9 | length 26.9
  Top w0.152: U1.C9@46.863,35.941 47.346,35.458 48.336,35.458 48.616,35.738 48.616,36.5 48.92,36.805 48.92,37.414 49.2,37.694 52.324,37.694 52.73,38.1 52.73,41.224 53.01,41.504 53.619,41.504 54,41.885 54,50.165 54.229,50.394 58.994,50.394 59,50.4 ; R5.C.1@59.092,49.7 R5.D.1@59.092,50.592
(U1.C14)MMC0.CD: R11.C.1 U1.C14 X2.9 | length 59.3
  Top w0.152: v1(39.878,36.576) U1.C14@40.513,35.941 ; X2.9@62.863,36.216 64.639,36.216 65.938,37.516 65.938,45.593 67.234,46.888 67.615,46.888 v1(68.224,47.498) 69.1,48.374 R11.C.1@69.1,51.292
  Bottom w0.152: v1(39.878,36.576) 40.132,36.322 40.132,35.611 41.427,34.315 43.231,34.315 45.364,36.449 55.575,36.449 58.014,38.887 58.014,45.441 59.69,47.117 61.976,47.117 62.967,48.108 67.615,48.108 v1(68.224,47.498)
(U1.C15)MMC0.D3: R10.B.1 U1.C15 X2.2 | length 46.4
  Top w0.152: v1(38.608,36.576) U1.C15@39.243,35.941 ; X2.2@62.863,43.916 63.88,43.916 64.414,44.45 64.414,47.117 v1(64.033,47.498) 64.6,48.065 64.6,50.5 64.1,51 R10.B.1@64.1,51.2
  Bottom w0.152: v1(38.608,36.576) 38.633,36.576 39.522,35.687 39.522,35.306 41.123,33.706 43.536,33.706 45.669,35.839 55.88,35.839 58.623,38.583 58.623,45.136 59.995,46.507 63.043,46.507 v1(64.033,47.498)
(U1.C16)MMC0.D2: R10.A.1 U1.C16 X2.1@62.863,45.016 | length 47.1
  Top w0.152: v1(37.338,36.576) U1.C16@37.973,35.941 ; X2.1@62.863,45.016 63.99,45.016 64.11,45.136 64.11,46.584 v1(63.195,47.498) 62.1,48.593 62.1,50.9 62.5,51.3 R10.A.1@63,51.3
  Bottom w0.152: v1(37.338,36.576) 37.897,37.135 38.837,37.135 39.243,36.728 39.243,36.424 39.827,35.839 39.827,35.458 41.275,34.011 43.383,34.011 45.517,36.144 55.728,36.144 58.318,38.735 58.318,45.288 59.842,46.812 62.509,46.812 v1(63.195,47.498)
(U1.G1)LCD.D2.B5: R9.6 U1.G1 | length 2.5
  Top w0.152: U1.G1@57.023,41.021 57.404,41.021 58.526,39.899 R9.6@59.038,39.899
(U1.G2)LCD.D1.B4: R9.7 U1.G2 | length 4
  Top w0.152: U1.G2@55.753,41.021 56.236,40.538 57.429,40.538 58.568,39.399 R9.7@59.038,39.399
(U1.G3)LCD.D0.B3: R9.8 U1.G3 | length 5.5
  Top w0.152: U1.G3@54.483,41.021 55.27,40.234 57.277,40.234 58.662,38.848 R9.8@59.038,38.848
(U1.H1)LCD.D5.G2: R8.3 U1.H1 | length 2.2
  Top w0.152: U1.H1@57.023,42.291 57.506,42.291 57.959,41.838 R8.3@59.038,41.838
(U1.H2)LCD.D4.B7: R8.4 U1.H2 | length 3.7
  Top w0.152: U1.H2@55.753,42.291 56.236,41.808 57.531,41.808 58.053,41.287 R8.4@59.038,41.287
(U1.H3)LCD.D3.B6: R9.5 U1.H3 | length 5.3
  Top w0.152: U1.H3@54.483,42.291 55.27,41.504 57.379,41.504 58.432,40.451 R9.5@59.038,40.451
(U1.J1)LCD.D8.G5: R7.4 U1.J1 | length 2.1
  Top w0.152: U1.J1@57.023,43.561 57.658,43.561 57.822,43.725 R7.4@59.038,43.725
(U1.J2)LCD.D7.G4: R8.1 U1.J2 | length 3.6
  Top w0.152: U1.J2@55.753,43.561 56.236,43.078 57.633,43.078 57.822,42.889 R8.1@59.038,42.889
(U1.J3)LCD.D6.G3: R8.2 U1.J3 | length 5.1
  Top w0.152: U1.J3@54.483,43.561 55.27,42.774 57.48,42.774 57.916,42.338 R8.2@59.038,42.338
(U1.K1)LCD.D11.R3: R7.1 U1.K1 | length 2.2
  Top w0.152: U1.K1@57.023,44.831 57.633,44.831 58.129,45.327 R7.1@59.038,45.327
(U1.K2)LCD.D10.G7: R7.2 U1.K2 | length 3.7
  Top w0.152: U1.K2@55.753,44.831 56.236,44.348 57.607,44.348 58.035,44.776 R7.2@59.038,44.776
(U1.K3)LCD.D9.G6: R7.3 U1.K3 | length 5
  Top w0.152: U1.K3@54.483,44.831 55.27,44.044 57.76,44.044 57.992,44.276 R7.3@59.038,44.276
(U1.K14)USBC.ID: D4.2 U1.K14 X1.ID | length 14.5
  Top w0.152: X1.ID@29.525,42.25 30.363,42.25 30.886,42.774 33.98,42.774 D4.2@34.462,42.227 34.48,42.291 34.925,42.735 36.639,42.735 37.655,41.719 39.357,41.719 39.878,42.24 39.878,44.196 U1.K14@40.513,44.831
(U1.K15)USBC.D+: D1.2 U1.K15 X1.D+ | length 12.1
  Top w0.152: X1.D+@29.525,42.9 30.327,42.9 30.505,43.078 34.361,43.078 D1.2@34.462,43.243 34.462,43.225 34.989,43.752 36.386,43.752 37.369,42.774 38.383,42.774 38.76,43.145 38.76,44.348 U1.K15@39.243,44.831
(U1.K16)USBC.D-: D2.2 U1.K16 X1.D- | length 12.6
  Top w0.152: X1.D-@29.525,43.55 30.339,43.55 30.505,43.383 33.586,43.383 D2.2@34.462,44.259 ; D2.2@34.462,44.114 D2.2@34.462,44.259 ; U1.K16@37.973,44.831 38.456,44.348 38.456,43.321 38.213,43.078 37.524,43.078 36.703,43.9 36.703,44.45 36.386,44.767 34.925,44.767 34.462,44.305 D2.2@34.462,44.259
(U1.L1)LCD.D14.R6: R6.2 U1.L1 | length 2.5
  Top w0.152: U1.L1@57.023,46.101 58.137,47.215 R6.2@59.038,47.215
(U1.L2)LCD.D13.R5: R6.3 U1.L2 | length 3.9
  Top w0.152: U1.L2@55.753,46.101 56.236,45.618 57.277,45.618 58.373,46.715 R6.3@59.038,46.715
(U1.L3)LCD.D12.R4: R6.4 U1.L3 | length 5.2
  Top w0.152: U1.L3@54.483,46.101 55.27,45.314 57.506,45.314 58.355,46.163 R6.4@59.038,46.163
(U1.M2)EEPROM.WP: U1.M2 U1.N3 WP.TP | length 3.1
  Top w0.152: U1.N3@54.483,48.641 v1(55.118,48.006) U1.M2@55.753,47.371
  Bottom w0.152: WP.TP@55.118,46.736 v1(55.118,48.006)
(U1.M3)LCD.D15.R7: R6.1 U1.M3 | length 5.4
  Top w0.152: U1.M3@54.483,47.371 55.27,46.584 56.947,46.584 58.263,47.9 R6.1@59.038,47.9
(U1.P13)USR0: U1.P13 USR0.2 | length 21.1
  Top w0.152: v1(34.496,36.93) 34.7,36.726 USR0.2@34.7,36 ; v1(41.148,48.006) 41.3,48.158 41.3,49.428 U1.P13@41.783,49.911
  Bottom w0.152: v1@34.5,36.9 33.858,37.542 33.858,45.822 36.678,48.641 40.513,48.641 v1(41.148,48.006)
(U1.P14)USR3: U1.P14 USR3.2 | length 26.3
  Top w0.152: USR3.2@28.067,36.006 28.067,36.667 v1@28.1,36.7 ; v1(39.878,49.276) U1.P14@40.513,49.911
  Bottom w0.152: v1@28.1,36.8 28.8,36.8 30.802,34.798 31.496,34.798 33.553,36.855 33.553,46.355 37.109,49.911 39.243,49.911 v1(39.878,49.276)
  other v1: 28.096,36.83
(U1.R14)USR2: U1.R14 USR2.2 | length 24.2
  Top w0.152: USR2.2@30.353,36.006 30.353,36.753 v1@30.4,36.8 ; v1(39.878,50.546) U1.R14@40.513,51.181
  Bottom w0.152: v1@30.4,36.8 30.4,36 31.682,36 33.249,37.567 33.249,47.015 36.144,49.911 36.144,50.241 37.059,51.156 39.268,51.156 v1(39.878,50.546)
  other v1: 30.396,36.83
(U1.T14)USR1: U1.T14 USR1.2 | length 22.5
  Top w0.152: v1(31.496,36.83) 32.37,36.83 32.6,36.6 USR1.2@32.6,36.2 ; v1(39.878,51.816) U1.T14@40.513,52.451
  Bottom w0.152: v1(31.496,36.83) 32.944,38.278 32.944,47.168 35.839,50.063 35.839,50.394 36.906,51.46 39.522,51.46 v1(39.878,51.816)
AIN0(1.8V): P1.19 U1.A8 | length 10.4
  Top w0.152: v1(47.498,34.036) U1.A8@48.133,33.401
  VDD w0.152: v1(47.498,34.036) 49.047,32.487 49.479,32.487 50.063,31.902 50.063,30.683 50.851,29.896 52.07,29.896 53.036,28.93 P1.19@54.17,28.93
AIN1(1.8V): P1.21 U1.B8 | length 12.2
  Top w0.152: U1.B8@48.133,34.671 v1(48.768,34.036)
  VDD w0.152: v1(48.768,34.036) 48.768,33.198 49.174,32.791 49.632,32.791 50.368,32.055 50.368,30.836 51.003,30.201 52.375,30.201 52.68,29.896 54.585,29.896 55.55,28.93 P1.21@56.71,28.93
AIN2(1.8V): P1.23 U1.B6 | length 13.2
  Top w0.152: U1.B6@50.673,34.671 50.19,34.188 50.19,33.147 50.546,32.791 52.375,32.791 53.061,32.106 53.061,31.039 53.746,30.353 57.827,30.353 P1.23@59.25,28.93
AIN3(1.8V): P1.25 U1.C6 | length 18.9
  Top w0.152: U1.C6@50.673,35.941 49.886,35.154 49.886,32.995 50.394,32.487 52.222,32.487 52.756,31.953 52.756,30.886 53.594,30.048 57.633,30.048 58.014,29.667 58.014,28.677 58.776,27.915 60.775,27.915 P1.25@61.79,28.93
AIN4(1.8V): P1.27 U1.C7 | length 23.2
  Top w0.152: U1.C7@49.403,35.941 49.886,36.424 50.952,36.424 51.384,35.992 v1(51.384,33.858)
  VDD w0.152: v1(51.384,33.858) 50.673,33.147 50.673,30.988 51.156,30.505 52.527,30.505 52.832,30.201 54.889,30.201 55.194,29.896 57.175,29.896 58.09,28.981 58.09,28.6 58.699,27.991 63.391,27.991 P1.27@64.33,28.93
AIN5(3.3V): P2.35 R5.B.2 U1.F3 | length 33.1
  Top w0.152: v1(53.848,39.37) 54.102,39.37 U1.F3@54.483,39.751 ; R5.B.2@60.1,51.5 60.6,51.5 v1@60.9,51.2
  VDD w0.152: v1(60.96,51.181) 62.459,52.68 64.186,52.68 65.634,54.127 65.634,54.889 66.396,55.651 73.169,55.651 P2.35@74.49,54.33
  Bottom w0.152: v1(53.848,39.37) 54.305,39.37 57.099,42.164 57.099,45.898 60.071,48.87 60.071,50.292 v1(60.96,51.181)
AIN6/GPIO87: P1.2 R5.C.2 U1.F2 | length 69.7
  Top w0.152: v1(55.118,39.116) U1.F2@55.753,39.751 ; 60.308,49.7 60.8,49.7 v1@60.9,49.6
  VDD w0.152: v1(41.148,46.736) 43.688,44.196 43.688,40.411 44.45,39.649 45.212,39.649 47.498,41.935 47.498,45.593 51.816,49.911 52.027,49.7 v1(61,49.7)
  Bottom w0.152: P1.2@31.31,31.47 32.579,30.201 34.392,30.201 35.154,30.963 35.154,35.687 41.275,41.808 41.275,44.069 40.513,44.831 40.513,46.101 v1(41.148,46.736) ; v1(55.118,39.116) 55.118,39.726 57.404,42.012 57.404,45.745 60.376,48.717 60.376,48.976 61.024,49.625 60.949,49.7 v1(61,49.7)
AIN7(1.8V): P2.36 U1.N13 | length 63.9
  Top w0.152: U1.N13@41.783,48.641 42.418,48.006 42.418,44.577 42.037,44.196 41.529,44.196 41.148,43.815 41.148,42.037 41.529,41.656 42.037,41.656 42.418,41.275 42.418,38.227 42.799,37.846 45.847,37.846 46.228,37.465 46.228,35.814 46.888,35.154 48.489,35.154 48.92,35.585 48.92,36.347 49.301,36.728 53.619,36.728 54,37.109 54,37.465 54.381,37.846 v1(54.864,37.846) ; v1(63.043,53.289) 63.271,53.518 63.271,57.328 63.881,57.937 73.423,57.937 P2.36@74.49,56.87
  Bottom w0.152: v1(54.864,37.846) 55.753,38.735 55.753,39.903 57.709,41.859 57.709,45.593 61.519,49.403 61.519,52.146 62.662,53.289 v1(63.043,53.289)
AIN.VREF+: C7.1 P1.18 U1.A7 U1.B7 | length 39.7
  Top w0.152: U1.B7@49.403,34.671 U1.A7@49.403,33.401 49.403,33.02 50.394,32.029 50.394,31.725 50.648,31.47 P1.18@51.63,31.47 52.908,30.192 52.908,28.753 54.051,27.61 74.701,27.61 75.54,28.448 75.54,31.877 74.93,32.487 72.678,32.487 C7.1@71.458,33.706
AIN.VREF-: C7.2 P1.17 U1.A9 U1.B9 | length 40.5
  Top w0.152: U1.B9@46.863,34.671 U1.A9@46.863,33.401 47.422,33.401 47.955,32.868 49.098,32.868 50.089,31.877 50.089,30.471 P1.17@51.63,28.93 ; C7.2@72.458,33.706 73.068,33.096 v1(73.177,33.096)
  VDD w0.152: P1.17@51.63,28.93 52.874,27.686 74.574,27.686 75.489,28.6 75.489,29.794 75.006,30.277 73.939,30.277 73.177,31.039 v1(73.177,33.096)
BAT.TEMP: P2.16 U1.N6 | length 10.2
  Top w0.152: P2.16@49.09,56.87 48.031,55.811 48.031,53.899 48.616,53.315 48.616,49.962 49.301,49.276 50.038,49.276 U1.N6@50.673,48.641
BAT.VIN: P2.14 U1.N7 U1.P8 U1.R8 U1.T8 | length 1.8
  Top w0.254: U1.P8@48.133,49.911 U1.N7@49.403,48.641
CGND: FB2.1 X1.CGND1 X1.CGND2 X1.CGND3 X1.CGND4 X1.CGND5 X1.CGND6 X2.G1 X2.G2 X2.G3 X2.G4 | length 5.5
  Top w0.152: X1.CGND4@26.85,39.1 26.889,39.1 v1(27.457,38.532) ; v1(28.931,45.288) X1.CGND6@29.4,45.758 ; v1(28.931,46.711) X1.CGND6@29.4,46.241 ; v1(29.87,45.288) X1.CGND6@29.4,45.759 ; v1(29.87,46.711) X1.CGND6@29.4,46.24 ; v1(63.043,49.251) 63.364,49.571 X2.G4@63.364,49.666 ; X2.G1@63.463,35.056 63.714,35.306 v1(63.881,35.306) ; X1.CGND6@29.4,45.758 X1.CGND6@29.4,46 ; X1.CGND6@29.4,45.759 X1.CGND6@29.4,46 ; X1.CGND6@29.4,46 X1.CGND6@29.4,46.24 ; X1.CGND6@29.4,46 X1.CGND6@29.4,46.241
  other v1: 72.187,34.773 72.949,34.773 73.711,34.773 72.187,35.306 72.949,35.306 73.711,35.306 26.238,38.532 28.931,39.091 29.87,39.091 26.238,39.675 27.457,39.675 28.931,40.513 29.87,40.513 26.238,41.072 27.457,41.072 26.238,42.316 27.457,42.316 26.238,43.485 27.457,43.485 26.238,44.729 27.457,44.729 26.238,46.126 27.457,46.126 26.238,47.269 27.457,47.269 63.729,49.251 63.043,50.089 63.729,50.089 72.187,50.317 72.949,50.317 73.711,50.317 72.187,50.851 72.949,50.851 73.711,50.851
GND: C5.2 C6.2 D1.1 D2.1 D3.1 D4.1 FB2.2 P1.15 P1.16 P1.22 P2.15 P2.21 POWER.1 POWER.2 R1.1 R1.A.2 R1.B.2 R1.C.2 R1.D.2 R3.1 R5.A.2 R5.D.2 R6.5 R6.6 R6.8 R7.5 R7.6 R7.7 R7.8 R8.6 R8.7 R8.8 R9.1 R9.2 R9.3 R12.1 U1.D8 U1.D9 U1.E5 U1.E6 U1.E7 U1.E8 U1.E9 U1.E10 U1.E11 U1.E12 U1.F5 U1.F12 U1.G5 U1.G12 U1.H4 U1.H5 U1.H12 U1.H13 U1.J4 U1.J5 U1.J12 U1.J13 U1.K5 U1.K12 U1.L5 U1.L12 U1.M5 U1.M6 U1.M7 U1.M8 U1.M9 U1.M10 U1.M11 U1.M12 U1.N8 U1.N9 U2.3 X1.GND X2.6 | length 39.2
  Top w0.152: U2.3@27.983,48.626 28.844,48.626 v1(29.083,48.387) ; 28.583,51.308 29.083,51.808 29.083,53.856 R1.1@28.583,54.356 ; R1.D.2@29.2,36 29.2,37 29.5,37.3 31,37.3 ; R1.C.2@31.5,35.808 31.5,36.2 31,36.7 31,37.3 ; R1.B.2@33.8,35.808 33.8,37.6 ; R1.A.2@36.1,35.9 36.1,37.6 33.8,37.6 ; R9.1@60,38.8 60.006,38.899 R9.2@60.038,39.399 ; R9.2@60,39.3 R9.2@60,39.45 R9.3@60,39.95 ; 60,42.1 R8.7@60,42.35 R8.8@60,42.901 R7.5@60,43.699 R7.6@60,44.25 R7.7@60,44.75 60,45.2 R7.8@60,45.301 R6.5@60,46.099 R6.6@60,46.65 ; R5.A.2@60.008,52.5 60.6,53.092 v1(60.6,53.1) ; R9.3@60.038,39.9 61.1,39.9 v1(61.1,40.5) ; R5.D.2@60.1,50.6 61.5,50.6 61.5,52.5 60.308,52.5 ; X2.6@62.863,39.516 63.976,39.516 64.186,39.726 v1(64.186,39.954) ; R12.1@67.277,34.011 R12.1@67.285,34.011 v1(68.072,34.011) ; 31,37.3 31.7,37.3 32,37.6 33.8,37.6
  Top w0.254: 28.583,51.308 28.583,50.665 v1(29.083,50.165) ; R8.6@60.038,41.838 R8.7@60.038,42.338
  Top w0.406: D4.1@35.388,42.227 v1(36.131,42.227) ; D1.1@35.388,43.243 v1(36.131,43.243) ; D2.1@35.388,44.259 v1(36.131,44.259) ; D3.1@35.388,45.276 v1(36.131,45.276)
  Top w0.61: v1(74.168,33.706) FB2.2@75.299,33.706
  other v1: 47.498,37.846 43.688,39.116 51.308,39.116 36.703,40.132 36.703,40.767 31.267,41.707 42.418,42.926 52.578,42.926 61.138,44.069 43.688,46.736 51.308,46.736 47.498,48.006
GPIO20: P1.20 U1.B4 | length 4.1
  Top w0.152: U1.B4@53.213,34.671 52.603,34.061 52.603,33.037 P1.20@54.17,31.47
GPIO23: P2.3 U1.P5 | length 25.3
  Top w0.152: v1(43.688,48.133) 43.967,47.854 46.025,47.854 46.38,48.209 46.38,48.895 46.609,49.124 48.387,49.124 48.616,48.895 48.616,48.285 49.047,47.854 51.054,47.854 51.46,48.26 51.46,49.428 U1.P5@51.943,49.911
  Bottom w0.152: P2.3@33.85,54.33 34.875,54.33 36.22,52.984 40.792,52.984 43.053,50.724 43.053,48.768 v1(43.688,48.133)
GPIO26: P1.34 U1.R5 | length 46.7
  Top w0.152: U1.R5@51.943,51.181 52.426,51.664 57.379,51.664 57.709,51.994 v1(58.166,51.994) ; P1.34@71.95,31.47 70.51,32.91 70.51,33.782 70.891,34.163 70.891,46.584 71.577,47.269 71.577,51.46 72.873,52.756 v1(73.254,52.756)
  VDD w0.152: v1(58.166,51.994) 59.614,50.546 61.214,50.546 63.043,52.375 64.338,52.375 65.1,53.137 72.873,53.137 v1(73.254,52.756)
GPIO27: P2.19 U1.T5 | length 3
  Top w0.152: U1.T5@51.943,52.451 52.291,52.451 P2.19@54.17,54.33
GPIO44: P2.24 U1.P6 | length 14.8
  Top w0.152: U1.P6@50.673,49.911 50.165,50.419 50.165,51.435 50.698,51.968 57.226,51.968 58.014,52.756 58.014,55.634 P2.24@59.25,56.87
GPIO45: P2.33 U1.R6 | length 24.8
  Top w0.152: U1.R6@50.673,51.181 v1(51.308,50.546)
  Bottom w0.152: v1(51.308,50.546) 53.975,53.213 59.766,53.213 60.528,53.975 60.528,54.966 61.214,55.651 70.629,55.651 P2.33@71.95,54.33
GPIO46: P2.22 U1.T6 | length 8.5
  Top w0.152: U1.T6@50.673,52.451 51.156,52.934 52.248,52.934 53.061,53.746 53.061,54.813 53.873,55.626 55.466,55.626 P2.22@56.71,56.87
GPIO47: P2.18 U1.P7 | length 8.3
  Top w0.152: U1.P7@49.403,49.911 48.92,50.394 48.92,52.654 50.165,53.899 50.165,55.405 P2.18@51.63,56.87
GPIO52: P2.10 U1.R13 | length 6.8
  Top w0.152: P2.10@41.47,56.87 40.335,55.735 40.335,53.823 41.3,52.857 41.3,51.664 U1.R13@41.783,51.181
GPIO57: P2.6 U1.T15 | length 5.6
  Top w0.152: P2.6@36.39,56.87 37.821,55.439 37.821,53.873 U1.T15@39.243,52.451
GPIO58: P2.4 U1.R15 | length 8.9
  Top w0.152: P2.4@33.85,56.87 35.069,55.651 36.678,55.651 37.516,54.813 37.516,53.67 38.608,52.578 38.608,51.816 U1.R15@39.243,51.181
GPIO59: P2.2 U1.T16 | length 9
  Top w0.152: P2.2@31.31,56.87 32.681,55.499 34.544,55.499 35.154,54.889 35.154,54.051 36.754,52.451 U1.T16@37.973,52.451
GPIO60: P2.8 U1.N14 | length 9.3
  Top w0.152: P2.8@38.93,56.87 40.03,55.77 40.03,53.67 40.996,52.705 40.996,49.124 U1.N14@40.513,48.641
GPIO64: P2.20 U1.R7 | length 8.4
  Top w0.152: U1.R7@49.403,51.181 49.886,51.664 49.886,52.4 50.724,53.238 52.019,53.238 52.756,53.975 52.756,55.456 P2.20@54.17,56.87
GPIO65: P2.17 U1.T7 | length 3
  Top w0.152: U1.T7@49.403,52.451 50.622,53.67 50.97,53.67 P2.17@51.63,54.33
GPIO89: P1.4 U1.E1 | length 41.5
  Top w0.152: U1.E1@57.023,38.481 57.404,38.862 v1(57.404,39.116)
  VDD w0.152: v1(40.132,41.656) 40.132,40.132 40.513,39.751 41.783,39.751 43.18,38.354 44.45,38.354 49.022,42.926 49.022,45.847 49.657,46.482 50.419,46.482 51.054,45.847 51.054,45.466 v1(57.404,39.116)
  Bottom w0.152: P1.4@33.85,31.47 33.85,34.104 34.544,34.798 34.544,35.56 40.132,41.148 v1(40.132,41.656)